# EAGLE board ds1307_tmp100_breakout (EAGLE 6.3)
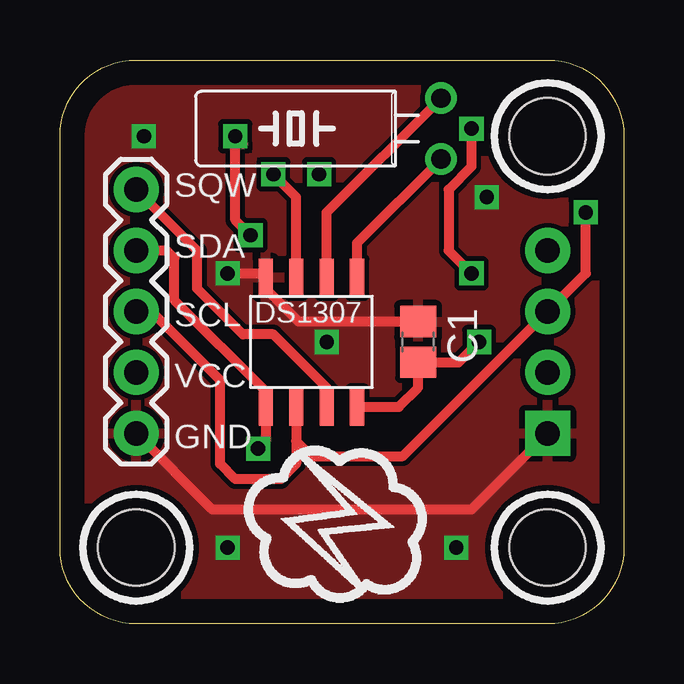
[diagram p0: board, top side]
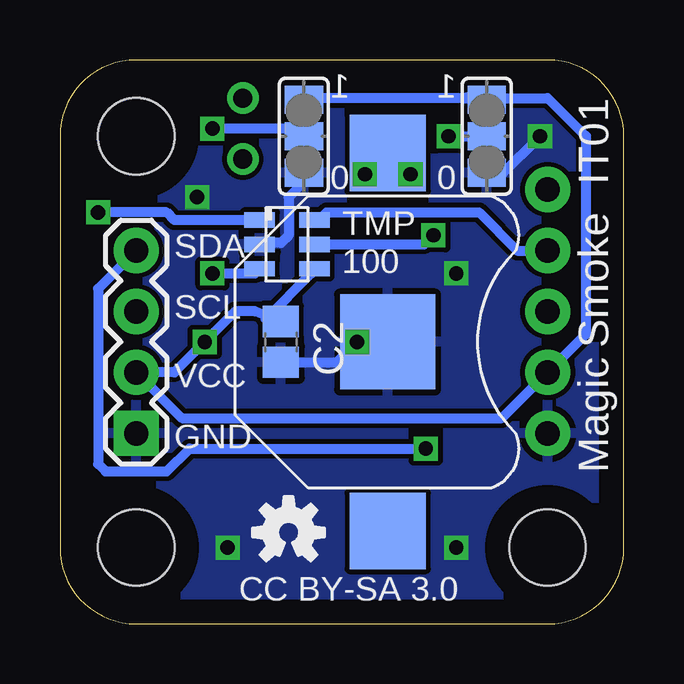
[diagram p1: board, bottom side, seen from below]

Size 23.5 x 23.5 mm. Coordinates in mm from the lower left corner, seen from the top.
Outline: 0,3.17 0,20.32 arc-90 3.17,23.5 20.32,23.5 arc-90 23.5,20.32 23.5,3.17 arc-90 20.32,0 3.17,0 arc-90 0,3.17
Copper layers (1*16): Top 0.035mm / dielectric 1.5mm / Bottom 0.035mm
Design rules "default": minimum track width 10mil, minimum drill 24mil, track to track 8mil, track to pad 8mil, pad to pad 8mil, via to via 8mil, smd to smd 8mil, copper to edge 40mil, drill to drill 8mil, minimum pad ring 10mil, minimum via ring 8mil, stop-mask expansion 4mil, vias tented up to drill 0mil, thermal gap 10mil
Holes 3.17 mm at 3.17,3.17 20.32,3.17 20.32,20.32
tRestrict: area 17.8,17.8 to 22.9,22.9; area 0.6,0.6 to 5.7,5.7; area 17.8,0.6 to 22.9,5.7
bRestrict: area 17.8,17.8 to 22.9,22.9; area 0.6,0.6 to 5.7,5.7; area 17.8,0.6 to 22.9,5.7

## Footprints (pad centres in the part's own frame; a part is rotated, then mirrored left to right if it is on the bottom)
BATTCON_12MM = smd 3.962 x 3.962: GND 0,0 | smd 3.175 x 3.175: PWR@1 -7.874,0; PWR@2 7.874,0
C0805 = smd 1.3 x 1.5: 1 -0.85,0; 2 0.85,0
SO-8 = smd 0.6 x 1.55: 1 -1.905,-2.69; 2 -0.635,-2.69; 3 0.635,-2.69; 4 1.905,-2.69; 5 1.905,2.71; 6 0.635,2.71; 7 -0.635,2.71; 8 -1.905,2.71
1X05 = drill 1.016 pad 1.88: 1 0,0; 2 2.54,0; 3 5.08,0; 4 7.62,0; 5 10.16,0
1X04 = drill 1.016 pad 1.88 square: 1 0,0 | drill 1.016 pad 1.88: 2 2.54,0; 3 5.08,0; 4 7.62,0
SJ_2 = smd 1.168 x 1.6: 1 -1.524,0; 2 0,0; 3 1.524,0
SOT23-6 = smd 0.635 x 1.27: 1 1.27,-0.254; 2 2.286,-0.254; 3 3.302,-0.254; 4 3.302,2.032; 5 2.286,2.032; 6 1.27,2.032
TC-38 = drill 0.8: P1 -1.27,-2.54; P2 1.27,-2.54

## Placement (x,y rotation side)
BAT1  [BATTCON_12MM]  9.84,11.75 270 bottom
C1  100 nF  [C0805]  14.92,11.75 90 top
C2  100 nF  [C0805]  14.29,11.75 270 bottom
DS1307  IC_RTC_DS1307  [SO-8]  10.48,11.75 180 top
JP2  [1X05]  3.17,7.94 90 top
JP3  [1X04]  20.32,7.94 90 bottom
SJ1  [SJ_2]  5.71,20.32 90 bottom
SJ2  [SJ_2]  13.34,20.32 90 bottom
TS1  TMP100  [SOT23-6]  14.92,18.1 270 bottom
U$1  [OSHW-LOGO-S]  13.97,3.81 0 bottom
XTAL1  [TC-38]  13.34,20.64 90 top

## Library data of the parts
BAT1 JP2 JP3 SJ1 SJ2 U$1 = SparkFun
C1 C2 = resistor
DS1307 XTAL1 = dp_devices
TS1 = termosensor

## Nets
AD0: SJ1.2 TS1.5
AD1: SJ2.2 TS1.3
GND: BAT1.GND C1.2 C2.2 DS1307.4 JP2.1 JP3.1 SJ1.1 SJ2.1 TS1.2
N$1: DS1307.1 XTAL1.P1
N$2: DS1307.2 XTAL1.P2
SCL: DS1307.6 JP2.3 JP3.3 TS1.1
SDA: DS1307.5 JP2.4 JP3.4 TS1.6
SQW: DS1307.7 JP2.5
VBAT: BAT1.PWR@1 DS1307.3
VCC: C1.1 C2.1 DS1307.8 JP2.2 JP3.2 SJ1.3 SJ2.3 TS1.4

## Tracks (layer width: path | path; a pad name or v marks a point on that pad's centre or on a via)
AD0  (via drill 0.6)
  Top 0.406: 7.62,20 v7.3,20.32 7.3,16.83 v7.94,16.19
  Bottom 0.406: v7.3,20.32 SJ1.2 | TS1.5 8.32,15.81 v7.94,16.19
AD1  (via drill 0.6)
  Top 0.406: v17.14,20.64 17.14,19.05 16.19,18.1 16.19,15.56 v17.14,14.61
  Bottom 0.406: SJ2.2 13.65,20.64 v17.14,20.64 | v17.14,14.61 15.37,14.61 TS1.3
GND  (via drill 0.6)
  Top 0.406: C1.2 9.95,12.6 8.57,13.97 DS1307.4 8.42,14.61 v6.99,14.61 | JP3.1 17.14,4.76 6.35,4.76 JP2.1
  Bottom 0.406: C2.2 11.96,10.9 v11.11,11.75 | SJ2.1 13.34,18.41 13.97,17.78 13.97,16.19 14.29,15.88 15.11,15.88 TS1.2 | v3.49,20.32 3.56,20.32 3.56,20.26 5.08,18.73 5.65,18.73 SJ1.1
  other vias: 6.99,3.17 16.51,3.17 17.78,17.78
  pour Bottom: -0.64,-0.64 -0.64,24.13 24.13,24.13 24.13,-0.64
  pour Top: -1.27,-1.27 -1.27,24.77 24.77,24.77 24.77,-1.27
N$1
  Top 0.406: DS1307.1 12.38,15.88 XTAL1.P1
N$2
  Top 0.406: DS1307.2 11.11,17.14 XTAL1.P2
SCL  (via drill 0.6)
  Top 0.406: JP2.3 3.81,13.02 6.67,10.16 6.67,6.67 7.3,6.03 9.21,6.03 9.84,6.67 9.84,7.62 | DS1307.6 9.84,7.62 | 9.84,7.62 10.48,6.99 14.29,6.99 JP3.3 21.91,14.61 v21.91,17.14
  Bottom 0.406: TS1.1 18.73,16.83 19.05,17.14 v21.91,17.14
SDA  (via drill 0.6)
  Top 0.406: JP2.4 4.45,15.56 4.76,15.24 4.76,13.49 8.57,9.68 DS1307.5 8.57,7.62 v8.26,7.3
  Bottom 0.406: TS1.6 12.7,16.83 12.38,17.14 6.03,17.14 4.45,15.56 JP2.4 | JP3.4 21.91,13.97 21.91,6.67 21.59,6.35 19.05,6.35 18.1,7.3 v8.26,7.3
SQW
  Top 0.406: DS1307.7 11.11,9.84 8.89,12.06 7.62,12.06 5.71,13.97 5.71,15.56 JP2.5
VBAT  (via drill 0.6)
  Top 0.406: DS1307.3 9.84,17.78 v8.89,18.73
  Bottom 0.406: 10.79,20.64 v8.89,18.73 8.95,18.73 BAT1.PWR@1 10.73,18.73 v10.79,18.73 8.89,20.64
VCC  (via drill 0.6)
  Top 0.406: DS1307.8 14.12,9.04 14.92,9.84 C1.1 16.61,10.9 v17.46,11.75
  Bottom 0.406: TS1.4 13.02,14.67 13.02,14.61 14.92,12.7 C2.1 15.34,13.02 16.19,13.02 v17.46,11.75 18.73,10.48 JP3.2 18.41,8.57 5.08,8.57 JP2.2 1.59,12.06 1.59,20.32 3.17,21.91 6.67,21.91 | SJ1.3 5.65,22.16 6.67,21.91 | 6.67,21.91 12.95,21.91 SJ2.3

## Text on the board
tPlace: SQW | SDA | SCL | VCC | GND
bPlace: IT01 | 1 | 1 | 0 | 0 | Smoke | TMP | 100 | SDA | SCL | Magic | VCC | GND | CC BY-SA 3.0